# Altium PCB R100.230.040.001-00 Filtr2.PcbDoc
Units mm, origin at the board's own origin, x right, y up, seen from the top; angles counter-clockwise.
Board outline 157 x 157 mm, 2 copper layers (Top, Bottom); 16 components, 6 nets, 50 pads, 0 vias.
Unrouted connection lines stored in the file: 24.
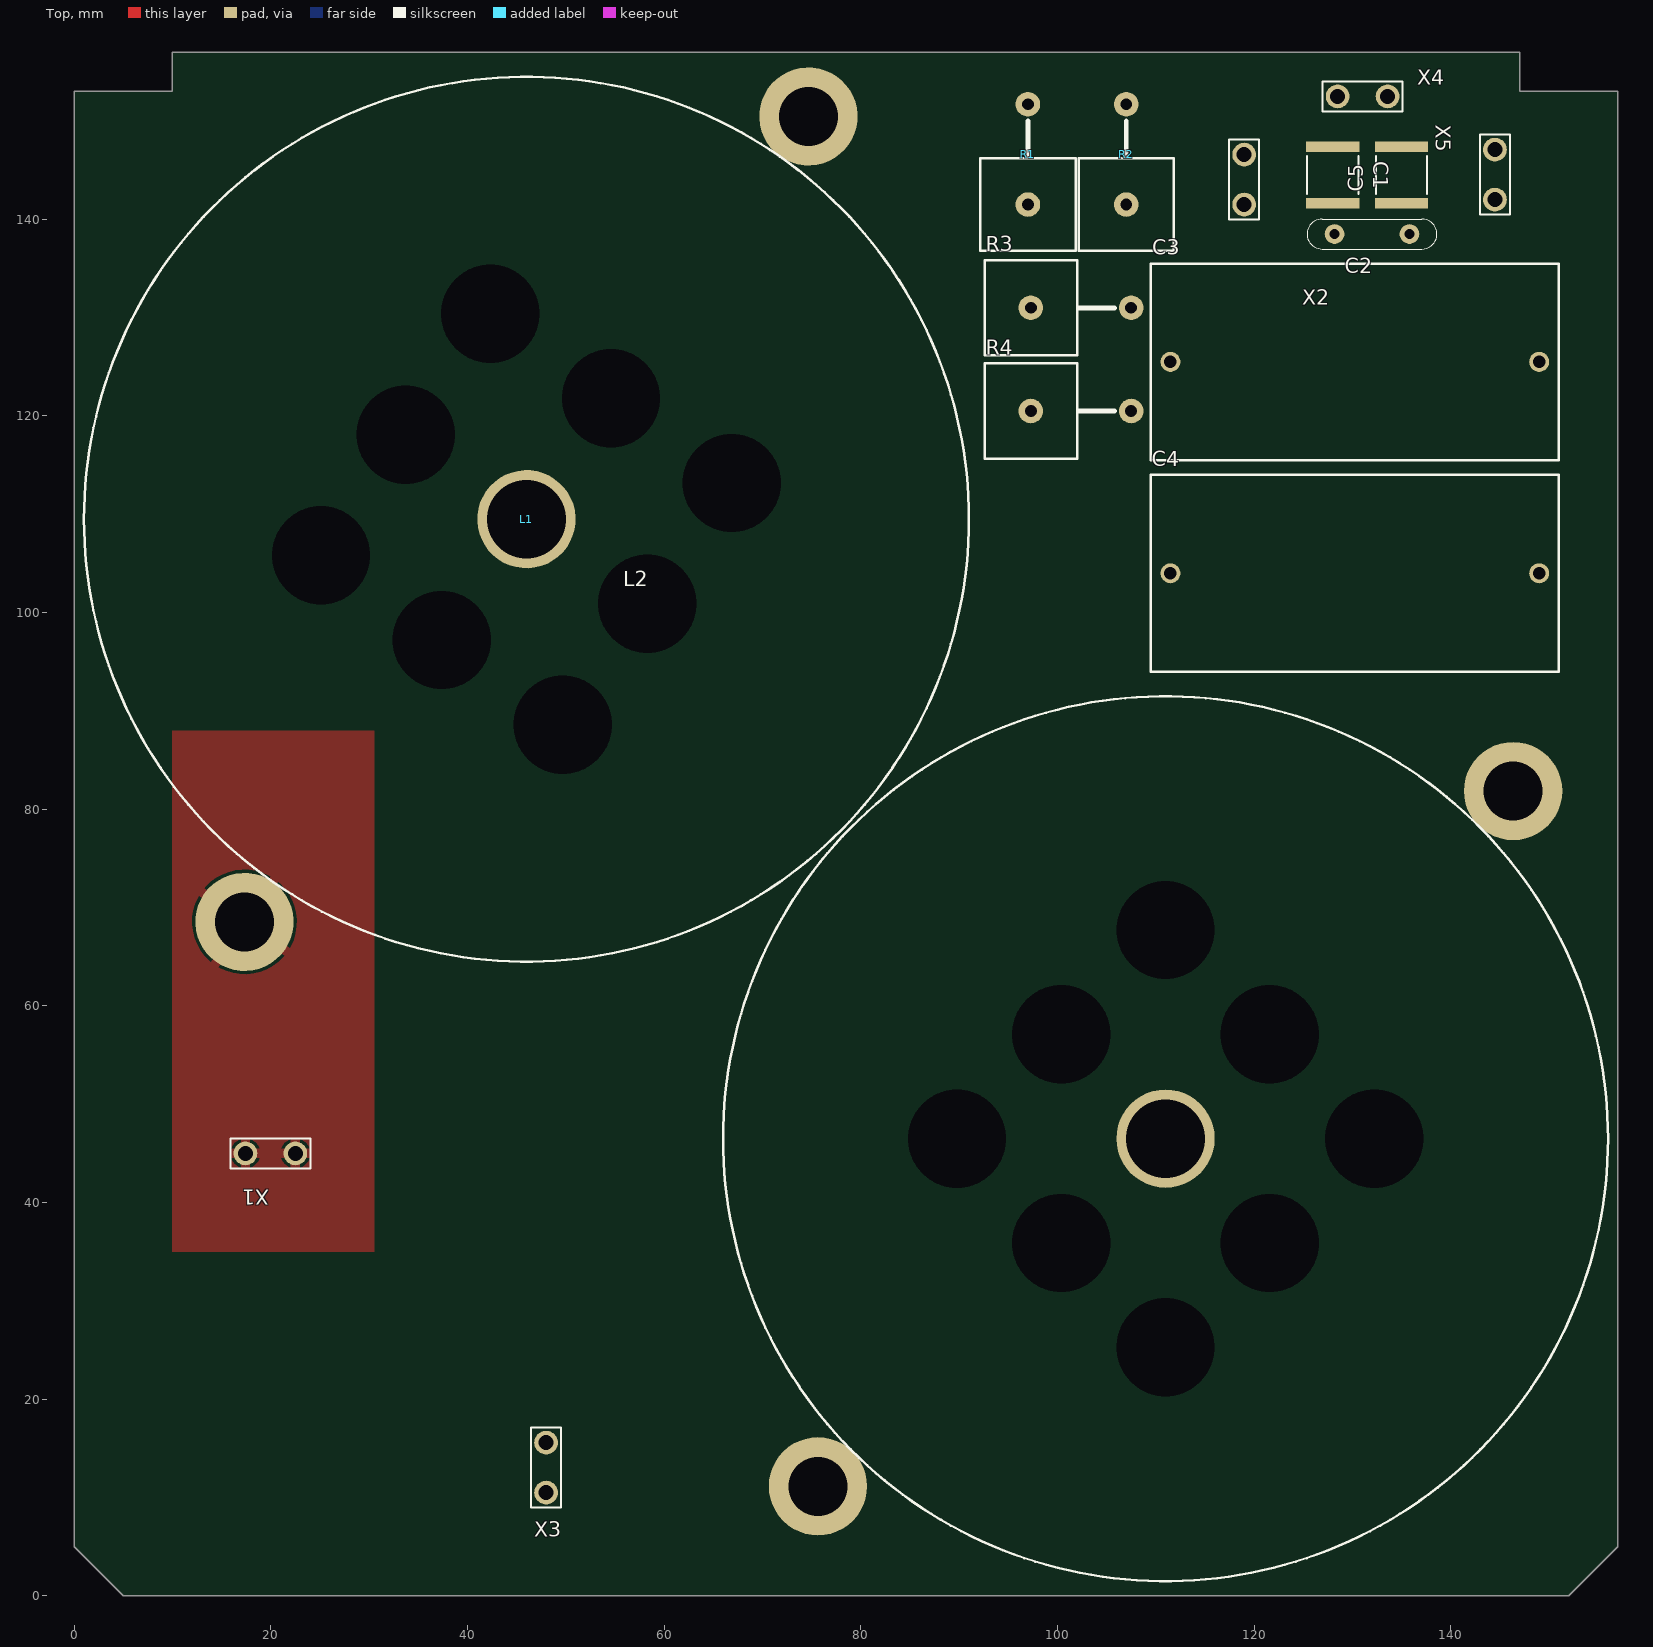
[diagram p0: Top view]
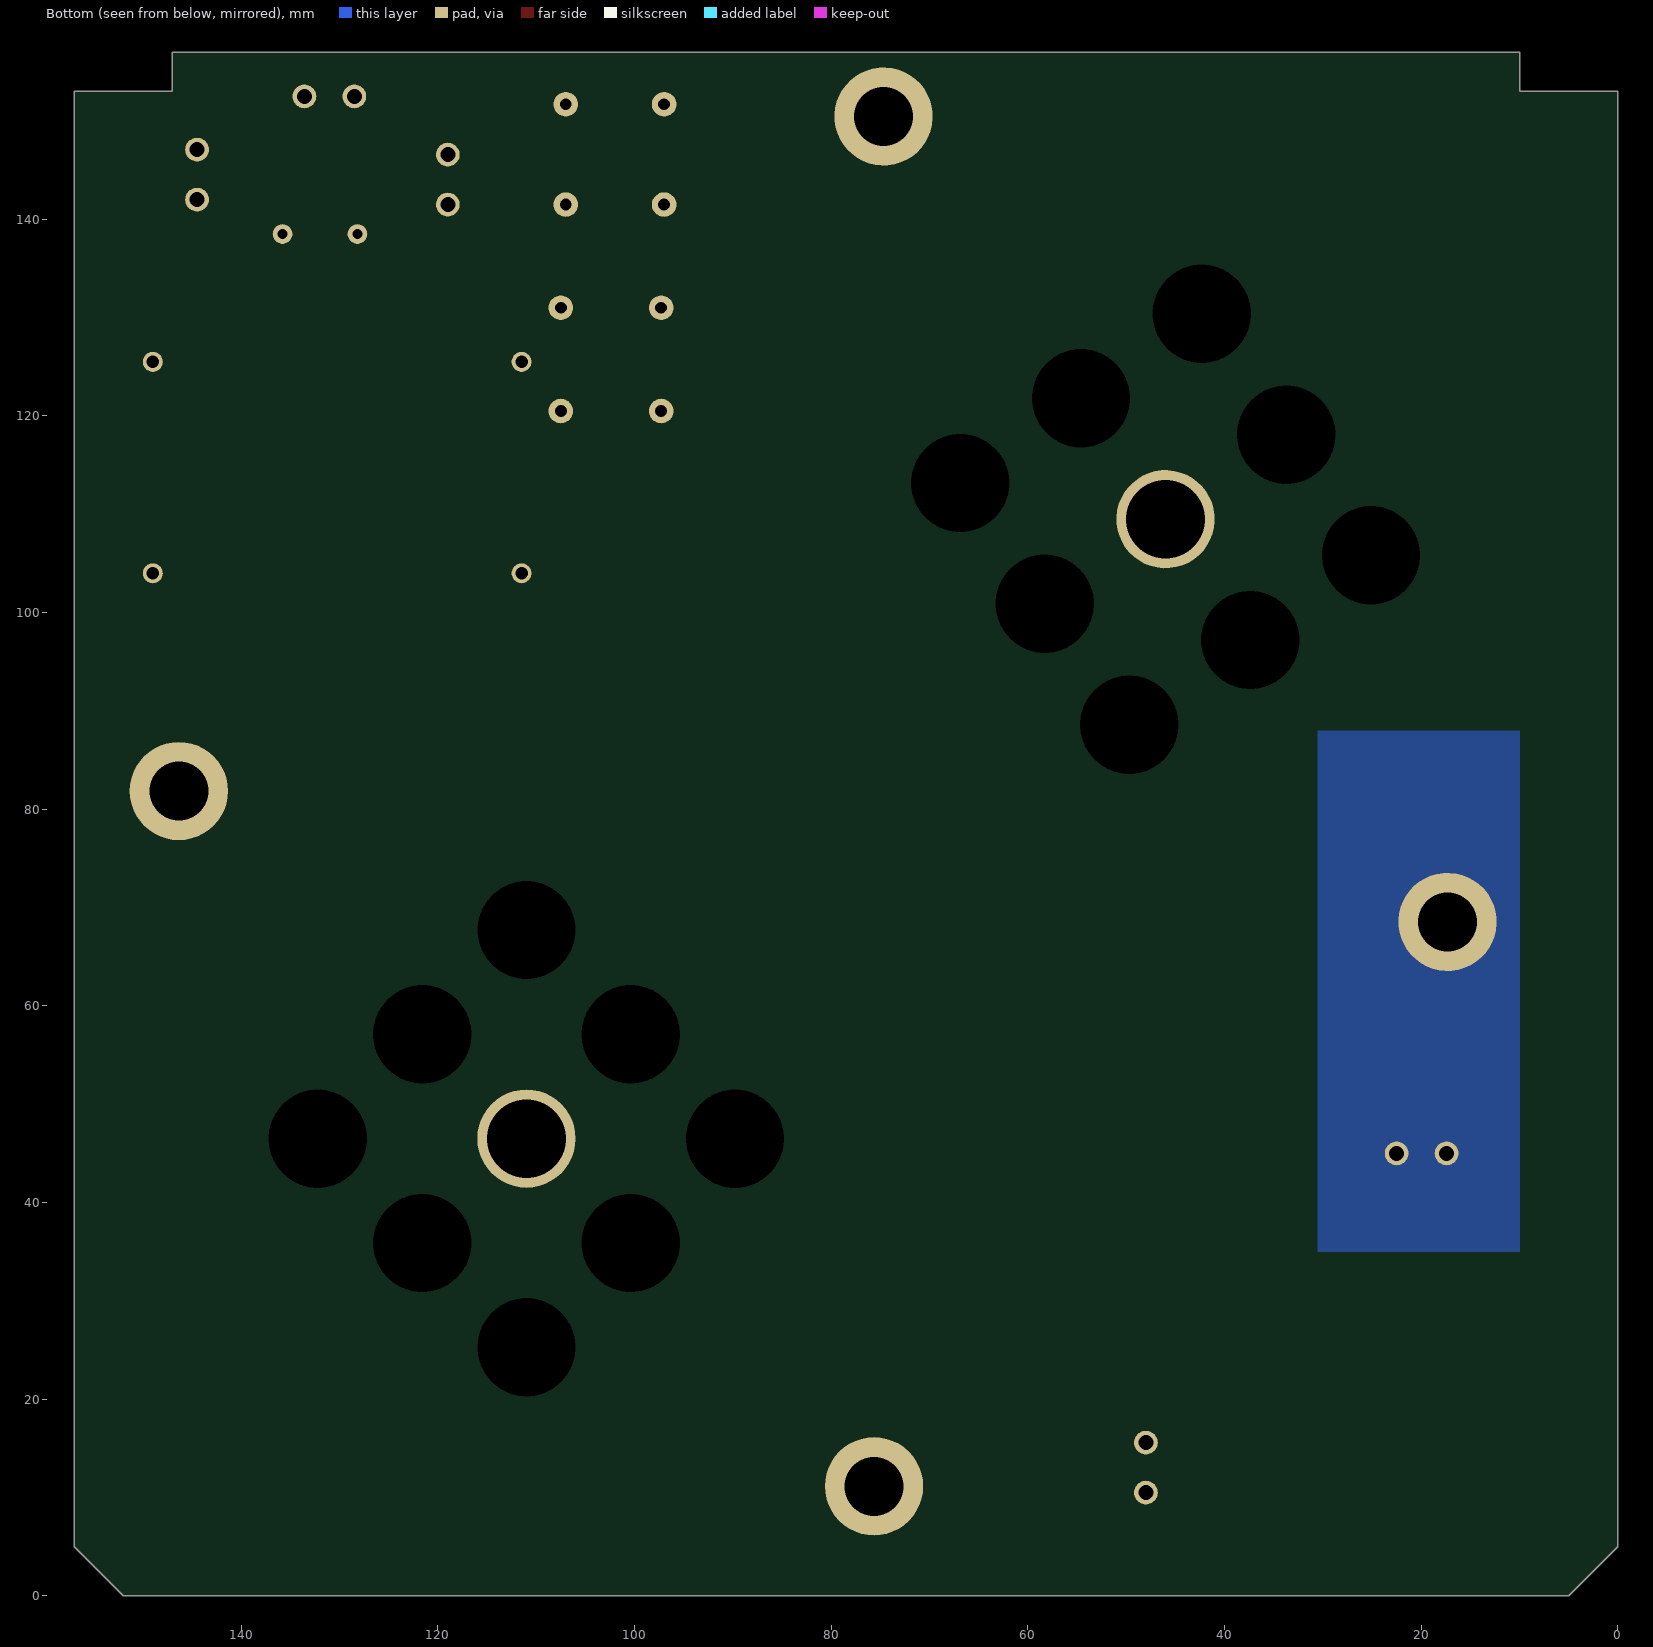
[diagram p1: Bottom view, seen from below]

## Layer stack, top to bottom
Top Solder: solder mask 0.0102, Solder Resist, Dk 3.5
Top: signal copper 0.0356
Dielectric 1: dielectric 0.32, FR-4, Dk 4.8
Bottom: signal copper 0.0356
Bottom Solder: solder mask 0.0102, Solder Resist, Dk 3.5

## Board outline
5,0 0,5 0,153 10,153 10,157 147,157 147,153 157,153 157,5 152,0

## Design rules (kind name [scope] priority, off if disabled: settings)
BoardOutlineClearance [All] p1: gap=0.5
Clearance Clearance_1 [(ObjectKind = 'Pad') And (Component = 'R10') And (Name = 'R10-2') vs InNet('VOUT-')] p1: gap=0.3
Clearance Clearance_Vout+- [InNet('VOUT+') or InNet('VOUT-')] p2: gap=1
Clearance Clearance_VOUT+-_4_+-Vin [InNet('VOUT+_4') or InNet('VOUT-_4') vs InNet('-VIN_200') or InNet('+VIN_200')] p3: gap=2
Clearance Clearance_VOUT+_4_VOUT-_4 [InNet('VOUT+_4') vs InNet('VOUT-_4')] p4: gap=2
Clearance Clearance_Vout_all [InNet('VOUT+_4') or InNet('VOUT-_4') or  InNet('VOUT+_3') or InNet('VOUT-_3') or InNet('VOUT+_2') or InNet('VOUT-_2') or InNet('VOUT+_1') or InNet('VOUT-_1') or InNet('VOUT+') or InNet('VOUT-')] p5: gap=1.2
Clearance Clearance_xp3_xp2_-Vin_200 [((ObjectKind = 'Pad') And (Component = 'XP3') And (Name = 'XP3-5')) or ((ObjectKind = 'Pad') And (Component = 'XP2') And (Name = 'XP2-5')) vs InNet('-VIN_200')] p6: gap=0.5
Clearance Clearance_+Vin_200_-Vin_200 [InNet('+VIN_200') vs InNet('-VIN_200')] p7: gap=2.2
Clearance Clearance_-Vin_200_All [InNet('-VIN_200') or InNet('+VIN_200')] p8: gap=1.2
Clearance [All] p9: gap=0.3 except(0.4: Arc-Poly Track-Poly SMDPad-Poly THPad-Poly Via-Poly Fill-Poly Poly-Poly)
ComponentClearance ComponentClearance_HS1 [(ObjectKind = 'Component') And (Name = 'HS1') or     (ObjectKind = 'Component') And (Name = 'HS2') or     (ObjectKind = 'Component') And (Name = 'HS3') or     (ObjectKind = 'Component') And (Name = 'HS4')] p1: gap=0.1 collisioncheckmode=3 verticalgap=0.1 showdistances=FALSE
ComponentClearance [All] p2: gap=0.254 collisioncheckmode=3 verticalgap=0.254 showdistances=FALSE
Height [All] p1: minheight=0 maxheight=63.5 prefheight=12.7
HoleSize [All] p1: absolutevalues=TRUE maxlimit=6.35 minlimit=0.025 maxpercent=80.000 minpercent=20.000
PolygonConnect PolygonConnect_shunt [(ObjectKind = 'Pad') And (Component = 'R10') And (Name = 'R10-1') or (ObjectKind = 'Pad') And (Component = 'R10') And (Name = 'R10-3')] p1: connectstyle=Direct reliefconductorwidth=0.254 reliefentries=4 polygonreliefangle="90 Angle" airgapwidth=0.254
PolygonConnect PolygonConnect_snnaber [((ObjectKind = 'Pad') And (Component = 'C3') And (Name = 'C3-2'))  or (ObjectKind = 'Poly') And (Net = 'NetC3_1')  or (ObjectKind = 'Pad') And (Component = 'R2') And (Name = 'R2-1')  or (ObjectKind = 'Pad') And (Component = 'VD2') And (Name = 'VD2-2')  or(ObjectKind = 'Pad') And (Component = 'C29') And (Name = 'C29-2') or (ObjectKind = 'Poly') And (Net = 'NetC29_1') or (ObjectKind = 'Pad') And (Component = 'VD6') And (Name = 'VD6-2') or (ObjectKind = 'Pad') And (Component = 'R8') And (Name = 'R8-1') or (ObjectKind = 'Poly') And (Net = 'N2') And (Name = 'Top Overlay-No Net')] p2: connectstyle=Direct reliefconductorwidth=0.254 reliefentries=4 polygonreliefangle="90 Angle" airgapwidth=0.254
PolygonConnect PolygonConnect_1 [IsStitchingVia] p3: connectstyle=Direct reliefconductorwidth=0.254 reliefentries=4 polygonreliefangle="90 Angle" airgapwidth=0.254
PolygonConnect PolygonConnect_bottom_fill [OnLayer('Bottom')] p4: connectstyle=Direct reliefconductorwidth=0.254 reliefentries=4 polygonreliefangle="90 Angle" airgapwidth=0.254
PolygonConnect PoligonConnect_top [OnLayer('Top')] p5: connectstyle=Relief reliefconductorwidth=1 reliefentries=4 polygonreliefangle="90 Angle" airgapwidth=0.3
RoutingVias [All] p1: holewidth=0.7 width=1.2 viastyle="Through Hole" minholewidth=0.5 minwidth=1 maxholewidth=5.08 maxwidth=7.62
SolderMaskExpansion [All] p1: expansion=0.102
Width Width_+Vin_200 [InNet('+VIN_200')] p1: maxlimit=50 minlimit=0.762 preferedwidth=10 checkconnectedcopper=TRUE
Width [InNet('No Net')] p2: maxlimit=0.254 minlimit=0.254 preferedwidth=0.254
27 further rules are at their usual default settings.

## Components (designator, comment, footprint, x,y, rotation, side; value= is the part's Value field where it differs from the comment)
C1 "4700pF X1/Y2" SMD_C_2220 128,144.5 r270 top
C2 "10nF 300V" "C Y2 D13 7.5B" 132,138.5 r180 top
C3 "2.2uF 600VDC" MKP_W20_H39.5_L41.5_LS37.5 111.5,125.5 r0 top
C4 "2.2uF 600VDC" MKP_W20_H39.5_L41.5_LS37.5 149,104 r180 top
C5 "4700pF X1/Y2" SMD_C_2220 135,144.5 r90 top
L1 "900/450uH 30A" "Dross (900/450 uH) R100230.041.000" 46,109.5 r55 top
L2 "900/450uH 30A" "Dross (900/450 uH) R100230.041.000" 111,46.5 r45 top
R1 "1" "PRW 5W vertical" 97,141.5 r90 top
R2 "1" "PRW 5W vertical" 107,141.5 r90 top
R3 "1" "PRW 5W vertical" 97.3,131 r0 top
R4 "1" "PRW 5W vertical" 97.3,120.5 r0 top
X1 "63849-1" 63849-1+insulator(154719-1) 17.42,45 r0 top
X2 "63849-1" 63849-1+insulator(154719-1) 119,146.58 r270 top
X3 "63849-1" 63849-1+insulator(154719-1) 48,15.58 r270 top
X4 "63849-1" 63849-1+insulator(154719-1) 144.5,142 r90 top
X5 "63849-1" 63849-1+insulator(154719-1) 128.5,152.5 r0 top

## Footprints (in the part's own frame and the unit in brackets; to place one, negate y for a bottom-side part, rotate by r counter-clockwise, add the part's x,y. Pads: shape width x height; smd on the part's side, far side on the other; paste and mask are expansions set on the pad)
63849-1+insulator(154719-1) [mil]
  round 95 hole 60: 1(0,0) 2(200,0)
  silkscreen extent -60,-60 260,60, body extent -106,-141 279,142, height 955
"C Y2 D13 7.5B" [mm]
  round 2 hole 1: 1(-3.81,0) 2(3.81,0)
  silkscreen extent -6.6,-1.52 6.6,1.52, body extent -6.49,-2 6.49,2, height 15.5
"Dross (900/450 uH) R100230.041.000" [mm]
  round 0 hole 10: 0(-15,0) 0(-15,-15) 0(-15,15) 0(0,-15) 0(0,15) 0(15,15) 0(15,-15) 0(15,0)
  round 10 hole 6: 1(-50,0) 2(50,0)
  round 10 hole 8: 3(0,0)
  silkscreen extent -45,-45 45,45, body extent -45,-45.11 45.2,45.21, height 52
MKP_W20_H39.5_L41.5_LS37.5 [mil]
  round 80 hole 50: 1(0,0) 2(1476.38,0)
  silkscreen extent -79,-394 1555,394, body extent -84,-399 1560,399, height 1555
"PRW 5W vertical" [mm]
  round 2.5 hole 1.2: 1(0,0) 2(10.2,0)
  silkscreen extent -4.7,-4.85 8.5,4.85, body extent -4.7,-4.85 10.66,4.85, height 24.3
SMD_C_2220 [mm]
  rect 1.05x5.4 smd: 1(-2.875,0) 2(2.875,0)
  silkscreen extent -1.95,-2.6 1.95,2.6, body extent -3.05,-2.7 3.05,2.7, height 2

## Part data
C1 C5: library part "C X1Y2 4700pF SMD 2220 250Vac 10%", "SMD C2220 MURATA 250Vac 10% X7R X1Y2"
C2: library part "C X1Y2 10nF D13 LS7.5", "Ceramic D=14 LS=7.5 300VAC X1Y2"
C3 C4: library part "MKP1 2.2uF 10% 600VDC", "Polypropelene W20 H39.5 L41.5 LS37.5 600VDC 10%"
L1 L2: library part "Dross 900/450uH 30A R100.230.041.000", "1000/250uH 30A  (Core CK40090 X2)"
R1 R2 R3 R4: library part "PRW 1 5W +-5%_1", "Выводной PRW 5W 1R +-5%"
X1 X2 X3 X4 X5: "PCB, 6.3х0.8, hole"

## Nets (pads, with @x,y where several pads share a name; then routed paths per layer and width w, separated by ;. In a path a pad name is that pad's centre, name@x,y a point inside that pad or via, vN(x,y) a via of type N, cw(c..) or ccw(c..) an arc to the next point about the centre after c; other vN are vias at no path point)
GND_SINK: C1.1 C5.2 X5.1 X5.2
NetC1_2: C1.2 C2.2 L1.2 R1.2 R2.2 R3.1 R4.1 X2.1 X2.2
NetC2_1: C2.1 C3.2 C4.1 C5.1 L2.2 X4.1 X4.2
NetC3_1: C3.1 C4.2 R1.1 R2.1 R3.2 R4.2
NetL1_1: L1.1 X1.1 X1.2
NetL2_1: L2.1 X3.1 X3.2
pads on no net: L1.0 L1.3 L2.0 L2.3

## Polygon pours and split planes (outlines as drawn)
NetL1_1 on Top "NetL1_1" (solid, pour order 0): 10,88 10,35 30.5,35 30.5,88
NetL1_1 on Bottom "NetL1_1" (solid, pour order 1): 10,35 10,88 30.5,88 30.5,35

## Silkscreen, mask and mechanical layers (free items; w line width, h text height)
Top Overlay:
  rectangle: 65,255.6 105,270.6
  rectangle: 21.1,297.4 60,309.1
  text "OLTEST 4.05.2018" at 67.8,383.2 h2.54
  text "R100.220.020.000" at 67.8,378.7 h2.54
  text "SourceBoard_v1" at 67.8,374.2 h2.54
Bottom Overlay:
  text "R100.220.020.001" at 108,379.5 h2.54
  text "SourceBoard_v1" at 108,375 h2.54
Board:
  the board outline again, w0.254